# Allegro board BBear_balance_carv2_0.brd
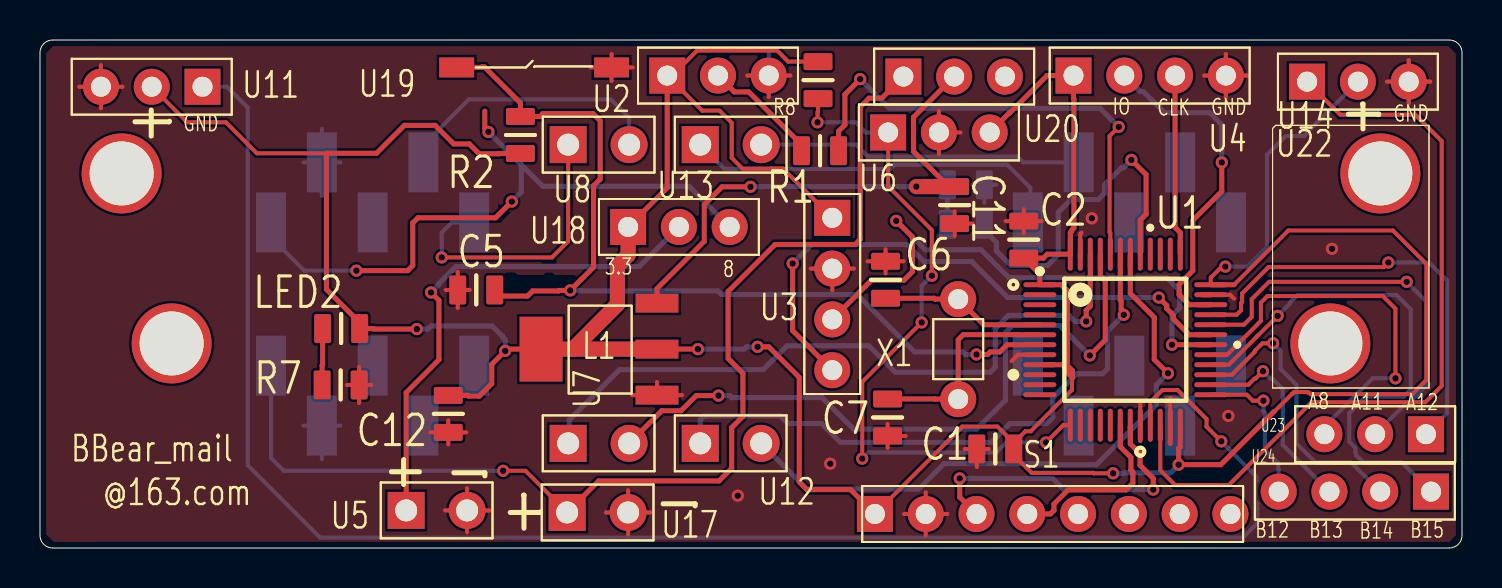
[diagram p0: board, top side]
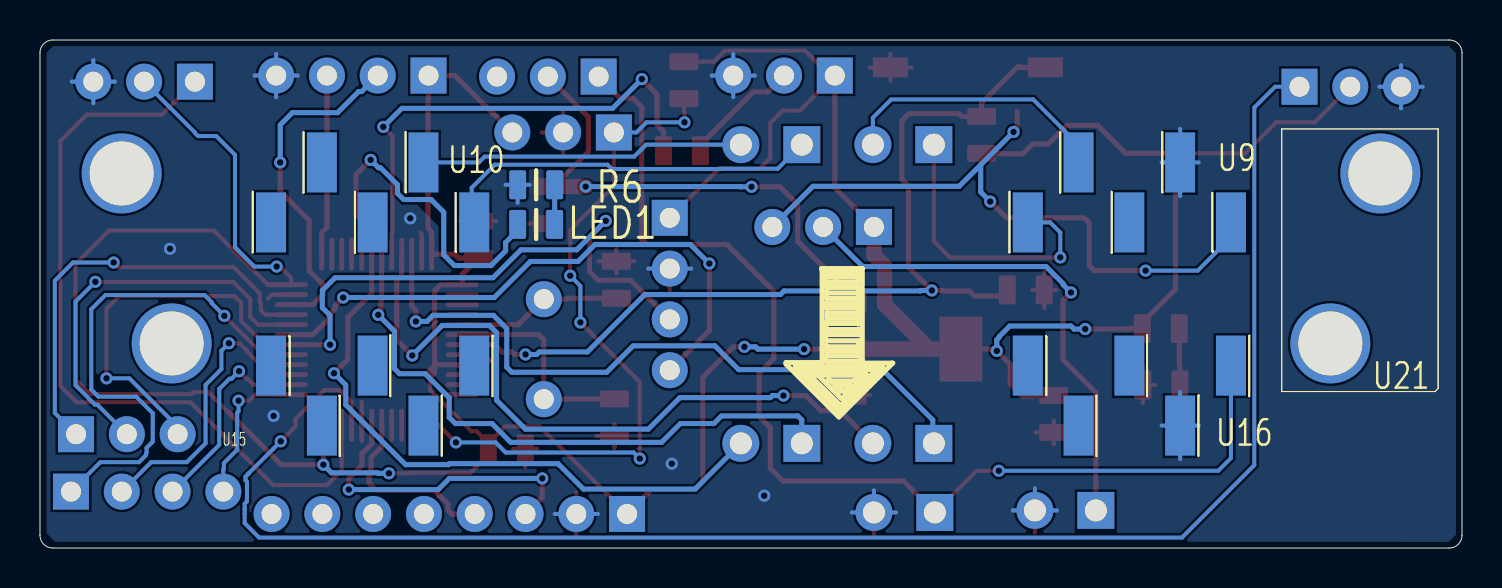
[diagram p1: board, bottom side, seen from below]

Outline 71.12 x 25.4 mm; copper layers: TOP, BOTTOM. Coordinates in mm from the lower left corner of the outline.
Outline path: 0,24.77 arc(0.19,25.21) 0.64,25.4 70.48,25.4 arc(70.93,25.21) 71.12,24.77 71.12,0.64 arc(70.93,0.19) 70.48,0 0.64,0 arc(0.19,0.19) 0,0.64 0,24.77

## Placement (name value [footprint] x y rotation side)
C1  0.1UF  [C-0805]  47.78 4.95 0 top
C2  0.1UF  [C-0805]  49.2 15.42 270 top
C5  1UF  [C-0805]  21.82 12.9 0 top
C6  22PF  [C-0805]  42.29 13.41 270 top
C7  22PF  [C-0805]  42.39 6.53 90 top
C11  0.1UF  [C-0805]  45.75 17.14 270 top
C12  10UF  [C-0805]  20.42 6.71 90 top
L1  LM1117  [LM1117_3_3]  30.86 12.24 180 top
LED1  HEARTLED  [C-0805]  46.3 16.18 0 bottom
LED2  POWER  [C-0805]  15.06 10.97 0 top
R1  10K  [C-0805]  39.01 19.86 0 top
R2  10K  [C-0805]  24.03 20.65 90 top
R6  1K  [C-0805]  46.3 18.16 0 bottom
R7  1K  [C-0805]  15.04 8.15 0 top
R8  10K  [C-0805]  38.91 23.39 270 top
S1  MPU6050  [CON8]  41.76 1.7 90 top
U1  STM32F103C8T6  [NCU100_LQFP_48]  54.28 10.41 0 top
U2  BOOT0  [CON3]  31.37 23.62 90 top
U3  -  [CON4]  39.62 16.51 0 top
U4  SWD  [CON4]  51.69 23.62 90 top
U5  CON2  [CON2_R2_54]  18.31 1.88 90 top
U6  KEY  [CON3]  42.42 20.78 90 top
U7  CON2  [CON2_R2_54]  26.42 5.23 90 top
U8  MOTOR-A  [CON2_R2_54]  26.42 20.17 90 top
U9  CON5  [TP2_54_5]  16.64 17.78 270 bottom
U10  CON5  [TP2_54_5]  54.48 17.78 270 bottom
U11  KEY  [CON3]  8.13 23.06 270 top
U12  CON2  [CON2_R2_54]  33.02 5.23 90 top
U13  MOTOR-B  [CON2_R2_54]  33.02 20.17 90 top
U14  KEY  [CON3]  63.37 23.32 90 top
U15  CON5  [TP2_54_5]  54.48 7.62 90 bottom
U16  CON5  [TP2_54_5]  16.64 7.62 90 bottom
U17  CON2  [CON2_R2_54]  26.37 1.78 90 top
U18  switch  [CON3]  29.41 16.05 90 top
U19  CON2  [3_6KEY]  24.71 24.03 0 top
U20  KEY  [CON3]  43.18 23.57 90 top
U21  CON2  [P4_003_20]  5.33 14.48 0 bottom
U22  CON2  [P4_003_20]  65.79 14.48 0 top
U23  KEY  [CON3]  69.32 5.69 270 top
U24  -  [CON4]  69.57 2.82 270 top
X1  -  [XTAL]  45.92 7.44 90 top

## Library data of the parts
C1 C2 C5-C7 C11 C12 = CAP: Tolerance: RichardLC; User Part Number: pn
L1 = LM1117
LED1 LED2 = LED: Tolerance: RichardLC; User Part Number: pn
R1 R2 R6-R8 = R: Tolerance: RichardLC; User Part Number: pn
S1 = CON8
U1 = STM32F103C8T6: User Part Number: pn; Tolerance: RichardLC
U2 U6 U11 U14 U18 U20 U23 = CON3
U3 U4 U24 = CON4
U5 U7 U8 U12 U13 U17 U19 U21 U22 = CON2
U9 U10 U15 U16 = CON5
X1 = XTAL

## Footprints (pads in the part's own frame, mm; a bottom-side part is the same pattern mirrored in y, then rotated)
3_6KEY
  rect 1.75x1 smd: 1(-3.875,0) 2(3.875,0)
C-0805
  custom 0.848x1.448 smd: 1(-0.925,0) 2(0.925,0)
CON2_R2_54
  rect 1.849x1.849 hole 1.1: 1(0,0)
  round 1.849 hole 1.1: 2(0,-3.048)
CON3
  rect 1.8x1.8 hole 1: 1(0,0)
  round 1.8 hole 1: 2(0,-2.54) 3(0,-5.08)
CON4
  rect 1.8x1.8 hole 1: 1(0,0)
  round 1.8 hole 1: 2(0,-2.54) 3(0,-5.08) 4(0,-7.62)
CON8
  rect 1.8x1.8 hole 1: 1(0,0)
  round 1.8 hole 1: 2(0,-2.54) 3(0,-5.08) 4(0,-7.62) 5(0,-10.16) 6(0,-12.7) 7(0,-15.24) 8(0,-17.78)
LM1117_3_3
  rect 2.15x0.95 smd: 1(0,0) 2(0,2.3) 3(0,4.6)
  rect 2.15x3.25 smd: 4(5.8,2.3)
NCU100_LQFP_48
  oval 1.651x0.249 smd: 1(-4.275,2.75) 2(-4.275,2.25) 3(-4.275,1.75) 4(-4.275,1.25) 5(-4.275,0.75) 6(-4.275,0.25) 7(-4.275,-0.25) 8(-4.275,-0.75) 9(-4.275,-1.25) 10(-4.275,-1.75) 11(-4.275,-2.25) 12(-4.275,-2.75) 25(4.275,-2.75) 26(4.275,-2.25) 27(4.275,-1.75) 28(4.275,-1.25) 29(4.275,-0.75) 30(4.275,-0.25) 31(4.275,0.25) 32(4.275,0.75) 33(4.275,1.25) 34(4.275,1.75) 35(4.275,2.25) 36(4.275,2.75)
  oval 0.249x1.651 smd: 13(-2.75,-4.275) 14(-2.25,-4.275) 15(-1.75,-4.275) 16(-1.25,-4.275) 17(-0.75,-4.275) 18(-0.25,-4.275) 19(0.25,-4.275) 20(0.75,-4.275) 21(1.25,-4.275) 22(1.75,-4.275) 23(2.25,-4.275) 24(2.75,-4.275) 37(2.75,4.275) 38(2.25,4.275) 39(1.75,4.275) 40(1.25,4.275) 41(0.75,4.275) 42(0.25,4.275) 43(-0.25,4.275) 44(-0.75,4.275) 45(-1.25,4.275) 46(-1.75,4.275) 47(-2.25,4.275) 48(-2.75,4.275)
P4_003_20
  round 4 hole 3.2: 1(-1.25,-4.25) 2(1.25,4.25)
TP2_54_5
  rect 3x1.5 smd: 1(1.5,5.08) 2(1.5,0) 3(1.5,-5.08) 4(-1.5,2.54) 5(-1.5,-2.54)
XTAL
  round 1.8 hole 1: 1(0,0) 2(5,0)

## Nets
GND: C1.1 C2.1 C5.1 C6.1 C7.1 C11.2 C12.1 L1.3(GND) R6.2 R7.2 S1.2 U1.8(VSSA) U1.20(PB2/BOOT1) U1.23(VSS_1) U1.35(VSS_2) U1.47(VSS_3) U2.3 U3.2 U4.4 U5.2 U6.2 U9.4 U11.3 U14.3 U16.5 U17.2 U19.2
VCC3.3: C1.2 C2.2 C12.2 L1.2(OUT2) L1.4(OUT1) LED2.2 R2.1 R8.1 S1.1 U1.1(VBAT) U1.9(VDDA) U1.24(VDD_1) U1.36(VDD_2) U1.48(VDD_3) U2.1 U3.1 U4.1 U6.3 U11.2 U14.2 U18.1
BAT+: U16.3 U17.1 U20.1
BAT_8V: U9.1 U18.3
BOOT0: R1.2 U1.44(BOOT0)
HEART_LED: LED1.2 U1.41(PB5)
LEFT_BACK: U1.43(PB7) U12.1
LEFT_FOR: U1.42(PB6) U12.2
MOTOR_BAT: U5.1 U18.2
MOTORA+: U8.1 U9.3
MOTORA-: U8.2 U9.5
MOTORB+: U10.1 U13.1
MOTORB-: U10.4 U13.2
OSCIN: C6.2 U1.5(OSCIN) X1.2
OSCOUT: C7.2 U1.6(OSCOUT) X1.1
PA3: R8.2 U1.13(PA3) U6.1
PA8: U1.29(PA8) U23.3
PA9: U1.31(PA10) U3.4
PA10: U1.30(PA9) U3.3
PA11: U1.32(PA11) U23.2
PA12: U1.33(PA12) U23.1
PB10: U1.21(PB10) U11.1
PB11: U1.22(PB11) U14.1
PB12: U1.25(PB12) U24.4
PB13: U1.26(PB13) U24.3
PB14: U1.27(PB14) U24.2
PB15: U1.28(PB15) U24.1
RESET: C5.2 R2.2 U1.7(NRST) U19.1
RIGHT_BACK: U1.46(PB9) U7.1
RIGHT_FOR: U1.45(PB8) U7.2
SCL: S1.3 U1.19(PB1)
SDA: S1.4 U1.18(PB0)
SWCLK: U1.37(SWCLK) U4.3
SWIO: U1.34(SWIO) U4.2
N00802: C11.1 L1.1(VCC-IN) U20.2
N03806: LED2.1 R7.1
N07785: LED1.1 R6.1
N073361: R1.1 U2.2

Pads without a net: S1 5 6 7 8; U1 2 3 4 10 11 12 14 15 16 17 38 39 40; U9 2; U10 2 3 5; U15 1 2 3 4 5; U16 1 2 4; U20 3; U21 1 2; U22 1 2

## Via types
v1: diameter 0.61, hole 0.33, TOP to BOTTOM, 50 vias

## Routing (per net, layer and track width the routed paths; a pad name or vN(x,y) marks a point on that pad's centre or on a via; arc(x,y) is an arc through that point)
GND: length 113.5
  TOP w0.203: C11.2 45.75,16.82 ; C11.2 46.65,16.22 ; C11.2 45.75,15.62 ; 42.29,13.73 C6.1 ; C6.1 43.19,14.34 ; C6.1 41.39,14.34 ; C6.1 42.29,14.94 ; 19.52,5.78 C12.1 ; C12.1 20.42,5.18 ; C12.1 20.42,6.38 ; C12.1 21.32,5.78 ; U6.2 46.04,20.78 ; U6.2 44.96,21.86 ; U6.2 44.96,19.7 ; 20.26,1.88 U5.2 ; U5.2 21.36,2.98 ; U5.2 21.36,0.78 ; U5.2 22.46,1.88 ; U11.3 4.13,23.06 ; U11.3 3.05,21.99 ; U11.3 3.05,24.14 ; U11.3 1.97,23.06 ; L1.3 30.86,8.3 ; L1.3 29.61,7.64 ; L1.3 32.11,7.64 ; 44.3,0.62 S1.2 ; S1.2 44.3,2.78 ; S1.2 45.38,1.7 ; S1.2 43.22,1.7 ; C5.1 20.89,13.81 ; C5.1 20.89,12 ; C5.1 20.29,12.9 ; C5.1 21.5,12.9 ; C7.1 42.39,6.2 ; C7.1 42.39,5 ; C7.1 43.29,5.6 ; 38.55,13.97 U3.2 ; U3.2 40.7,13.97 ; U3.2 39.62,12.89 ; U4.4 59.31,24.7 ; U4.4 59.31,22.54 ; U4.4 60.39,23.62 ; U4.4 58.23,23.62 ; 28.31,1.78 U17.2 ; U17.2 29.41,0.68 ; U17.2 29.41,2.88 ; U17.2 30.52,1.78 ; R7.2 16.56,8.15 ; R7.2 15.36,8.15 ; R7.2 15.96,9.06 ; R7.2 15.96,7.25 ; U1.23 56.53,7.48 56.54,7.49 ; U14.3 68.45,24.4 ; U14.3 69.53,23.32 ; U14.3 67.37,23.32 ; U14.3 68.45,22.24 ; 55.04,7.29 55.03,7.28 U1.20 55.03,5.35 ; C2.1 50.1,16.34 ; C2.1 49.2,16.95 ; C2.1 48.3,16.34 ; C2.1 49.2,15.74 ; U19.2 28.59,24.71 ; U19.2 28.59,23.35 ; U19.2 27.54,24.03 ; U19.2 29.64,24.03 ; U2.3 37.53,23.62 ; U2.3 35.37,23.62 ; U2.3 36.45,22.54 ; 46.25,4.95 C1.1 ; C1.1 46.85,4.05 ; C1.1 47.45,4.95 ; U1.35 59.52,12.66 59.72,12.47 ; 48.59,9.35 48.91,9.66 U1.8 ; 52.1,15.77 52.03,15.71 U1.47
  TOP w0.254: 52.03,14.54 U1.47 ; 56.53,5.22 U1.23 ; C7.1 42.09,5.6 ; 58.1,12.66 U1.35
  BOTTOM w0.203: 38.55,13.97 U3.2 40.7,13.97 ; 45.38,1.7 S1.2 43.22,1.7 ; U17.2 29.41,2.88 ; U17.2 30.52,1.78 ; U17.2 28.31,1.78 ; 58.23,23.62 U4.4 ; U4.4 59.31,22.54 ; U4.4 59.31,24.7 ; U4.4 60.39,23.62 ; R6.2 47.83,18.16 ; R6.2 46.63,18.16 ; R6.2 47.23,17.26 ; 14.1,4.44 U16.5 ; U16.5 14.1,7.8 ; U16.5 13.17,6.12 ; U16.5 15.03,6.12 ; 1.97,23.06 U11.3 ; U11.3 3.05,21.99 ; U11.3 3.05,24.14 ; U11.3 4.13,23.06 ; 35.37,23.62 U2.3 ; U2.3 36.45,22.54 ; U2.3 37.53,23.62 ; U2.3 36.45,24.7 ; 68.45,22.24 U14.3 ; U14.3 68.45,24.4 ; U14.3 67.37,23.32 ; U14.3 69.53,23.32 ; U5.2 21.36,2.98 ; U5.2 22.46,1.88 ; U5.2 20.26,1.88 ; 14.1,17.6 U9.4 ; U9.4 14.1,20.96 ; U9.4 13.17,19.28 ; U9.4 15.03,19.28
  vias: v1(34.9,2.62) v1(39.52,4.22) v1(52.6,16.48) v1(59.44,6.6) v1(64.62,14.96)
VCC3.3: length 203.2
  TOP w0.203: R8.1 37.96,24.32 37.96,24.32 37.42,24.32 37.28,24.46 36.87,24.87 32.86,24.87 31.61,23.62 U2.1 33.12,21.87 33.99,21.87 34.59,21.26 34.59,19.51 35.14,18.96 36.57,18.96 36.58,18.97 37.16,18.97 U3.1 ; U11.2 7.37,21.29 9.3,21.29 10.85,19.74 14.33,19.74 ; v1(59.28,14.07) 59.11,14.07 58.55,13.52 U1.36 ; 48.7,5.25 47.88,6.07 46.13,6.07 S1.1 ; 48.7,5.25 C1.2 48.7,4.65 49.6,3.76 52.68,3.76 52.71,3.73 v1(53.67,3.73) ; 48.7,5.25 49.29,5.84 49.55,5.84 51.61,7.9 51.61,8.48 51.64,8.51 ; 59.72,13.16 62.43,15.88 67.67,15.88 69.34,14.2 69.34,8.41 68.63,7.7 63.55,7.7 63.52,7.72 63.52,7.72 63.47,7.76 63.41,7.78 63.34,7.8 62.71,7.8 62.64,7.72 62.61,7.7 61.73,6.82 61.71,6.82 ; 14.35,16.99 14.33,16.97
  TOP w0.254: U4.1 50.37,23.62 48.49,21.74 48.46,21.74 U6.3 ; U4.1 51.69,22.47 51.71,22.45 51.71,16 51.6,15.89 51.6,15.84 51.53,15.77 U1.48 50.37,14.69 50.18,14.49 C2.2 50,13.69 U1.1 51.08,13.16 51.38,12.86 51.38,8.76 51.64,8.51 51.64,8.86 51.34,9.16 U1.9 ; U4.1 51.69,23.77 ; 61.71,6.82 59.06,4.17 v1(56.95,4.17) 56.95,4.98 57.03,5.06 U1.24 ; v1(35.89,10.06) 36.45,10.06 37.97,8.53 37.97,3.3 38.35,2.92 40.54,2.92 S1.1 ; C12.2 21.4,7.63 21.44,7.59 21.97,7.59 22.59,8.22 22.59,9.18 v1(23.27,9.86) 23.35,9.94 L1.4 ; 59.72,13.16 U1.36 ; v1(18.85,10.95) 16.69,10.95 16.67,10.97 LED2.2 15.99,11.27 14.33,12.93 14.33,19.74 16.83,19.74 18.23,21.13 19.76,21.13 20.69,20.2 21.47,20.2 21.96,19.71 22.96,19.71 22.98,19.73 R2.1 ; U18.1 31.37,18.01 U2.1 ; L1.2 v1(32.9,9.94)
  TOP w0.762: U18.1 29.41,14.64 28.88,14.11 28.88,12.18 26.64,9.94 ; L1.4 26.64,9.94 ; 26.64,9.94 L1.2
  BOTTOM w0.203: U14.2 63.37,20.78 63.37,20.75 63.22,20.6 62.31,20.6 61.37,19.66 61.37,15.04 60.4,14.07 v1(59.28,14.07)
  BOTTOM w0.254: v1(18.85,10.95) 19.41,10.95 19.56,11.1 22.62,11.1 23.14,10.58 23.14,10.54 23.27,10.41 v1(23.27,9.86) ; v1(53.67,3.73) 54.23,3.73 54.25,3.76 56.54,3.76 v1(56.95,4.17) ; v1(32.9,9.94) 35.22,9.94 35.33,10.06 v1(35.89,10.06)
BAT+: length 56.2
  TOP w0.203: U17.1 24.28,3.86 v1(23.16,3.86)
  TOP w0.254: U17.1 27.94,3.35 33.96,3.35 34.59,3.99 34.59,6.02 35.15,6.58 35.15,8.74 34.42,9.47 34.42,12.83 36.77,15.18 40.77,15.18 41.02,15.43 41.02,22.05 41.47,22.49 42.1,22.49 U20.1
  BOTTOM w0.203: U16.3 11.56,4.5 12.19,3.86 v1(23.16,3.86)
BAT_8V: length 33.3
  TOP w0.254: 22.25,21.84 22.25,20.98 v1(22.43,20.8) ; v1(23.6,17.32) 22.78,16.51 18.9,16.51 18.64,16.26 18.64,14.12 18.39,13.87 v1(15.82,13.87)
  BOTTOM w0.203: v1(15.82,13.87) 13.22,13.87 11.56,15.53 U9.1
  BOTTOM w0.254: U18.3 32.46,18.08 25.15,18.08 24.07,19.16 ; v1(23.6,17.32) 24.07,17.8 24.07,19.16 ; 24.07,19.16 v1(22.43,20.8)
BOOT0: length 24.5
  TOP w0.203: v1(53.95,21.06) 53.49,20.6 53.49,15.78 53.53,15.74 U1.44
  TOP w0.254: R1.2 39.94,20.84 40.26,21.16 40.26,22.68 v1(41.02,23.44)
  BOTTOM w0.254: v1(53.95,21.06) 53.02,21.98 42.48,21.98 v1(41.02,23.44)
HEART_LED: length 17.5
  TOP w0.254: U1.41 55.03,16.4 55.32,16.69 55.32,18.67 v1(54.58,19.41)
  BOTTOM w0.254: LED1.2 47.23,15.88 47.83,15.28 47.83,14.85 48.56,14.12 50.39,14.12 50.93,14.66 50.93,16.79 51.56,17.42 52.93,17.42 53.24,17.73 53.24,18.16 54.09,19.01 54.19,19.01 v1(54.58,19.41)
LEFT_BACK: length 30.4
  TOP w0.254: v1(54.2,11.66) 54.2,11.8 54.07,11.93 54.07,12.35 54.03,12.39 U1.43
  BOTTOM w0.254: v1(54.2,11.66) 53.39,10.85 53.39,8.97 53.14,8.71 51.85,8.71 50.65,7.51 50.65,6.53 50.34,6.22 48.51,6.22 47.57,5.28 40.03,5.28 39.09,6.22 37.41,6.22 37.03,6.6 33.21,6.6 33.02,6.41 U12.1
LEFT_FOR: length 31
  TOP w0.254: v1(56.41,8.74) 55.73,9.42 55.73,11.53 54.53,12.73 U1.42
  BOTTOM w0.254: U12.2 38.35,2.95 43.94,2.95 45.21,4.22 50.65,4.22 50.7,4.17 52.83,4.17 55.83,7.16 55.83,8.15 v1(56.41,8.74)
MOTOR_BAT: length 25.5
  TOP w0.254: U5.1 18.31,3.2 18.29,3.23 18.31,3.25 18.31,7.77 19.95,9.41 19.95,12.38 v1(19.56,12.78)
  BOTTOM w0.254: v1(19.56,12.78) 19.95,13.17 19.95,13.22 20.8,14.07 29.97,14.07 U18.2
MOTORA+: length 14.6
  TOP w0.203: U8.1 26.42,15.34 25.6,14.53 v1(20.09,14.53)
  BOTTOM w0.203: v1(20.09,14.53) 20.09,15.77 20.6,16.28 U9.3
MOTORA-: length 14.1
  BOTTOM w0.203: 19.05,19.41 19.05,20.03 21.45,22.43 28.55,22.43 29.46,21.51 U8.2 ; 19.05,19.41 U9.5 ; 19.05,19.41 19.05,19.28
MOTORB+: length 19.4
  BOTTOM w0.203: U13.1 34.22,18.96 37.09,18.96 37.11,18.95 42.52,18.95 42.74,19.16 48.37,19.16 49.53,18.01 49.53,16.41 U10.1
MOTORB-: length 16.5
  BOTTOM w0.203: 52.2,19.28 U10.4 49.17,19.28 48.88,19.57 41.4,19.57 40.81,20.17 U13.2
OSCIN: length 8.3
  TOP w0.254: C6.2 44.73,12.49 44.77,12.44 X1.2 47.2,11.16 U1.5
OSCOUT: length 10.7
  TOP w0.254: C7.2 44.76,7.45 44.77,7.44 X1.1 45.92,10.41 46.18,10.67 48.92,10.67 48.93,10.66 U1.6
PA3: length 34.7
  TOP w0.203: v1(38.89,21.29) 38.89,21.79 38.91,21.82 R8.2 ; v1(41.12,4.47) 41.12,8.31 v1(44.09,11.28) ; U6.1 42.42,18.08 44.6,15.9 v1(44.6,13.61) ; U1.13 51.18,6.14 v1(50.32,5.28)
  BOTTOM w0.203: v1(41.12,4.47) 41.43,4.78 47.83,4.78 48.33,5.28 v1(50.32,5.28) ; U6.1 41.29,20.78 40.78,21.29 v1(38.89,21.29) ; v1(44.6,13.61) 44.09,13.11 v1(44.09,11.28)
PA8: length 19.7
  TOP w0.203: U1.29 59.37,9.66 61.06,11.35 61.06,12.27 61.39,12.6 67.16,12.6 67.79,11.96 v1(67.79,8.48)
  BOTTOM w0.203: U23.3 64.24,6.07 66.65,8.48 v1(67.79,8.48)
PA9: length 29.5
  TOP w0.254: v1(55.96,12.52) 56.35,12.13 56.35,11.97 56.68,11.64 56.68,11.46 57.48,10.66 U1.31 ; v1(37.64,14.22) 37.64,10.87 U3.4
  BOTTOM w0.254: v1(55.96,12.52) 48.4,12.52 46.6,14.33 44.21,14.33 43.36,15.18 38.59,15.18 v1(37.64,14.22)
PA10: length 28.3
  TOP w0.254: U1.30 v1(56.61,10.16) ; U3.3 41.58,13.39 43.21,13.39 43.64,13.82 43.64,15.54 v1(42.82,16.36)
  BOTTOM w0.254: v1(56.61,10.16) 56.61,11.63 57,12.01 57,12.88 56.36,13.51 48.46,13.51 47.07,14.91 44.27,14.91 v1(42.82,16.36)
PA11: length 20.4
  TOP w0.203: v1(68.35,13.31) 61.47,13.31 60.6,12.45 60.6,11.56 60.21,11.16 U1.32
  BOTTOM w0.203: U23.2 68.25,7.16 68.37,7.16 69.34,8.14 69.34,12.32 v1(68.35,13.31)
PA12: length 21.9
  TOP w0.203: v1(67.44,14.27) 67.21,14.05 61.44,14.05 60.12,12.73 60.12,12.3 60.07,12.25 60.07,11.89 59.85,11.66 U1.33
  BOTTOM w0.203: U23.1 70.38,6.75 70.38,13.37 69.47,14.27 v1(67.44,14.27)
PB10: length 84
  TOP w0.203: v1(59.08,5.33) 58.34,6.07 58.34,6.45 56.9,7.9 56.13,7.9 55.53,7.3 U1.21
  BOTTOM w0.203: U11.1 9.35,23.06 10.39,22.02 10.39,4.14 14.01,0.52 60.16,0.52 60.88,1.24 60.88,1.71 60.88,1.71 60.88,1.94 60.88,1.94 60.88,2.22 60.77,2.33 60.77,3.31 60.84,3.38 60.84,3.57 60.73,3.68 60.71,3.71 60.71,3.71 60.66,3.76 59.46,4.96 v1(59.08,5.33)
PB11: length 38.9
  TOP w0.203: U14.1 65.02,21.67 68.78,21.67 70.1,20.35 70.1,8.1 69.29,7.29 63.6,7.29 59.46,3.15 56.77,3.15 56.03,3.89 U1.22
PB12: length 7.6
  TOP w0.203: U1.25 60.36,7.66 60.66,7.37 v1(61.19,7.37)
  BOTTOM w0.203: v1(61.19,7.37) 61.19,6.83 61.26,6.76 61.26,4.91 61.93,4.24 61.93,3.97 61.95,3.95 U24.4
PB13: length 10.3
  TOP w0.203: U1.26 60.44,8.16 60.74,8.46 60.79,8.46 v1(61.16,8.84)
  BOTTOM w0.203: U24.3 62.15,5.16 62.15,7.95 61.64,8.46 61.54,8.46 v1(61.16,8.84)
PB14: length 14.5
  TOP w0.203: U1.27 59.61,8.66 59.7,8.76 59.7,8.76 60.76,9.82 60.76,9.86 61.14,10.24 v1(61.67,10.24)
  BOTTOM w0.203: U24.2 65.56,4.29 63.78,4.29 62.84,5.23 62.84,8.15 62.05,8.94 62.05,9.86 v1(61.67,10.24)
PB15: length 26.1
  TOP w0.203: v1(61.9,11.61) 60.87,10.58 60.86,10.58 60.86,10.57 59.46,9.16 U1.28
  BOTTOM w0.203: v1(61.9,11.61) 62.53,12.24 62.53,12.29 62.89,12.65 67.84,12.65 68.55,11.94 68.55,7.93 68.2,7.57 66.31,7.57 65.48,6.74 65.48,5.32 65.79,5.01 65.79,4.78 65.81,4.72 65.83,4.66 65.83,4.63 66.17,4.29 68.1,4.29 U24.1
RESET: length 47
  TOP w0.254: U1.7 48.37,10.16 48,9.8 47.52,9.8 47.4,9.68 v1(46.84,9.68) ; C5.2 23.05,12.6 24.39,12.6 24.64,12.85 25.93,12.85 25.96,12.88 v1(26.52,12.88) 27.09,13.45 27.09,13.45 27.69,14.04 27.69,18.11 28.02,18.44 28.02,21.36 27.66,21.72 25.15,21.72 25.01,21.58 R2.2 24.03,22.25 22.23,24.05 22.1,24.05 22.07,24.03 U19.1
  BOTTOM w0.254: v1(46.84,9.68) 46.28,9.68 46.15,9.8 43.74,9.8 40.87,12.67 34.09,12.67 33.91,12.85 27.1,12.85 27.08,12.88 v1(26.52,12.88)
RIGHT_BACK: length 35
  TOP w0.254: v1(52.32,11.33) 52.32,11.89 52.53,12.09 52.53,13.61 52.53,13.61 U1.46
  BOTTOM w0.254: v1(52.32,11.33) 51.77,11.33 51.46,11.63 48.44,11.63 47.78,10.97 47.78,9.04 47.52,8.79 42.77,8.79 41.45,10.11 37.36,10.11 36.17,8.92 28.98,8.92 26.47,6.4 26.47,5.28 U7.1
RIGHT_FOR: length 35
  TOP w0.254: v1(52.5,9.63) 53.28,10.4 53.28,13.36 53.03,13.61 U1.45 ; v1(33.93,7.62) 32.82,7.62 32.06,6.86 31.09,6.86 U7.2
  BOTTOM w0.254: v1(52.5,9.63) 51,11.13 48.64,11.13 48.29,10.77 48.29,7.39 46.84,5.94 40.69,5.94 39.12,7.52 34.59,7.52 34.49,7.62 v1(33.93,7.62)
SCL: length 15.7
  TOP w0.254: U1.19 54.53,5.21 55.02,4.72 55.02,4.14 55.68,3.48 v1(55.68,2.92) ; S1.3 46,2.54 v1(46,3.48)
  BOTTOM w0.254: v1(46,3.48) 50.65,3.48 51.21,2.92 v1(55.68,2.92)
SDA: length 9.3
  TOP w0.254: U1.18 54.03,5.06 54.56,4.53 54.56,3.9 54.66,3.8 54.66,3.25 54.32,2.91 51.42,2.91 50.71,2.2 50.71,1.88 50.53,1.7 S1.4
SWCLK: length 9.2
  TOP w0.254: 56.77,23.77 U4.3 56.77,16.03 57.03,15.77 U1.37
SWIO: length 17.1
  TOP w0.254: v1(59.11,19.28) 59.11,17.83 57.66,16.38 57.66,13.87 56.97,13.18 56.97,12.67 57.48,12.16 U1.34
  BOTTOM w0.254: v1(59.11,19.28) 59.11,21.16 58.5,21.77 56.24,21.77 55.18,22.82 55.03,22.82 U4.2
N00802: length 25.9
  TOP w0.254: v1(35.53,18.06) 34.11,18.06 33.22,17.17 33.22,15.33 30.86,12.97 L1.1 ; U20.2 43.69,21.54 43.69,19.83 45.45,18.07
  TOP w0.762: v1(43.83,18.07) C11.1
  BOTTOM w0.254: v1(35.53,18.06) 36.09,18.06 36.1,18.07 v1(43.83,18.07)
N03806: length 2.8
  TOP w0.254: R7.1 14.11,9.13 14.14,9.16 LED2.1
N07785: length 2
  BOTTOM w0.254: LED1.1 R6.1
N073361: length 5.9
  TOP w0.254: R1.1 38.09,20.16 35.45,22.81 34.73,22.81 U2.2

## Copper pours and planes (outline as drawn; the poured copper is in the pictures)
GND on TOP: 22.53,16.26 22.53,15.52 23.06,14.99 24.74,14.99 24.74,16.13 24.64,16.23 23.8,16.23 23.75,16.28 23.75,16.84 23.6,16.84 23.06,16.31 23.06,16.26
GND on TOP: 20.47,16.89 19.61,16.89 19.15,17.35 19.15,18.19 19.18,18.21 20.17,18.21 20.5,17.88 20.5,16.92
GND on TOP: 24.94,15.85 24.94,14.81 24.99,14.76 25.5,14.76 26.01,15.27 25.43,15.85
GND on TOP: 68.45,25.09 68.45,25.1 70.43,25.1 70.82,24.71 70.82,0.64 70.48,0.3 68.45,0.3 68.45,0.31 2.69,0.31 2.69,0.3 0.69,0.3 0.3,0.69 0.3,24.74 0.66,25.1 2.67,25.1 ; 8 cut-outs
GND on BOTTOM: 70.46,25.09 70.79,24.77 70.79,0.74 70.36,0.31 2.72,0.31 2.72,0.3 0.66,0.3 0.3,0.66 0.3,24.74 0.66,25.1 2.67,25.1 ; 9 cut-outs

## Text on the board
Ref Des/Silkscreen Top: GND | 3.3 | 8 | IO | CLK | B12 | A8 | B13 | A11 | B14 | A12 | B15 | BBear_mail | @163.com
COMPVAL_TYPE_TOP: FIGURE | SIZE | 13.0 | 39.37 | 43.3 | 125.98 | DRILL CHART: TOP to BOTTOM | ALL UNITS ARE IN MILS | PLATED | QTY | 50 | 43 | 12 | 4
